# EAGLE board M8416C (EAGLE 6.6.0)

Size 398.65 x 214.63 mm. Coordinates in mm from the lower left corner, seen from the top.
Copper layers (1+16): Top 0.035mm / dielectric 1.5mm / Bottom 0.035mm
Design rules "16mils": minimum track width 16mil, minimum drill 32mil, track to track 15mil, track to pad 10mil, pad to pad 10mil, via to via 10mil, smd to smd 10mil, copper to edge 13mil, drill to drill 10mil, minimum pad ring 10mil, minimum via ring 8mil, stop-mask expansion 0mil, vias tented up to drill 0mil, thermal gap 10mil

## Footprints (pad centres in the part's own frame; a part is rotated, then mirrored left to right if it is on the bottom)
E12-8 = drill 1.016: + -10.16,0 | drill 1.016 octagon: - 10.16,0
C063-025X075 = drill 0.813 octagon: 1 -2.54,0; 2 3.81,0
DO35-10 = drill 0.813 long: A 5.08,0; C -5.08,0
DIL16 = drill 0.813 long: 1 -8.89,-3.81; 2 -6.35,-3.81; 3 -3.81,-3.81; 4 -1.27,-3.81; 5 1.27,-3.81; 6 3.81,-3.81; 7 6.35,-3.81; 8 8.89,-3.81; 9 8.89,3.81; 10 6.35,3.81; 11 3.81,3.81; 12 1.27,3.81; 13 -1.27,3.81; 14 -3.81,3.81; 15 -6.35,3.81; 16 -8.89,3.81
DIL14 = drill 0.813 long: 1 -7.62,-3.81; 2 -5.08,-3.81; 3 -2.54,-3.81; 4 0,-3.81; 5 2.54,-3.81; 6 5.08,-3.81; 7 7.62,-3.81; 8 7.62,3.81; 9 5.08,3.81; 10 2.54,3.81; 11 0,3.81; 12 -2.54,3.81; 13 -5.08,3.81; 14 -7.62,3.81
SOCKET-16 = drill 0.813 long: 1 -8.89,-3.81; 2 -6.35,-3.81; 3 -3.81,-3.81; 4 -1.27,-3.81; 5 1.27,-3.81; 6 3.81,-3.81; 7 6.35,-3.81; 8 8.89,-3.81; 9 8.89,3.81; 10 6.35,3.81; 11 3.81,3.81; 12 1.27,3.81; 13 -1.27,3.81; 14 -3.81,3.81; 15 -6.35,3.81; 16 -8.89,3.81
DIL28 = drill 0.813 long: 1 -16.51,-7.62; 2 -13.97,-7.62; 3 -11.43,-7.62; 4 -8.89,-7.62; 5 -6.35,-7.62; 6 -3.81,-7.62; 7 -1.27,-7.62; 8 1.27,-7.62; 9 3.81,-7.62; 10 6.35,-7.62; 11 8.89,-7.62; 12 11.43,-7.62; 13 13.97,-7.62; 14 16.51,-7.62; 15 16.51,7.62; 16 13.97,7.62; 17 11.43,7.62; 18 8.89,7.62; 19 6.35,7.62; 20 3.81,7.62; 21 1.27,7.62; 22 -1.27,7.62; 23 -3.81,7.62; 24 -6.35,7.62; 25 -8.89,7.62; 26 -11.43,7.62; 27 -13.97,7.62; 28 -16.51,7.62
DIL24-6 = drill 0.813 long: 1 -13.97,-7.62; 2 -11.43,-7.62; 3 -8.89,-7.62; 4 -6.35,-7.62; 5 -3.81,-7.62; 6 -1.27,-7.62; 7 1.27,-7.62; 8 3.81,-7.62; 9 6.35,-7.62; 10 8.89,-7.62; 11 11.43,-7.62; 12 13.97,-7.62; 13 13.97,7.62; 14 11.43,7.62; 15 8.89,7.62; 16 6.35,7.62; 17 3.81,7.62; 18 1.27,7.62; 19 -1.27,7.62; 20 -3.81,7.62; 21 -6.35,7.62; 22 -8.89,7.62; 23 -11.43,7.62; 24 -13.97,7.62
10H = drill 0.914: 1 -5.08,-1.27 | drill 0.914 octagon: 2 -5.08,1.27; 3 -2.54,-1.27; 4 -2.54,1.27; 5 0,-1.27; 6 0,1.27; 7 2.54,-1.27; 8 2.54,1.27; 9 5.08,-1.27; 10 5.08,1.27 | hole 3.302: -10.922,0.533; 10.922,0.533
TO5 = drill 0.813 octagon: 1 0,-2.54; 2 2.54,0; 3 0,2.54
0207/10 = drill 0.813 octagon: 1 -5.08,0; 2 5.08,0
0207/15 = drill 0.813 octagon: 1 -7.62,0; 2 7.62,0
EDGE-CON12 = smd 2.032 x 13.106: AA1 394.652,7.938; AB1 391.478,7.938; AC1 388.303,7.938; AD1 385.127,7.938; AE1 381.952,7.938; AF1 378.777,7.938; AH1 375.603,7.938; AJ1 372.428,7.938; AK1 369.252,7.938; AL1 366.077,7.938; AM1 362.902,7.938; AN1 359.728,7.938; AP1 356.553,7.938; AR1 353.377,7.938; AS1 350.202,7.938; AT1 347.027,7.938; AU1 343.853,7.938; AV1 340.678,7.938; BA1 324.803,7.938; BB1 321.627,7.938; BC1 318.452,7.938; BD1 315.277,7.938; BE1 312.103,7.938; BF1 308.928,7.938; BH1 305.752,7.938; BJ1 302.577,7.938; BK1 299.402,7.938; BL1 296.228,7.938; BM1 293.053,7.938; BN1 289.877,7.938; BP1 286.702,7.938; BR1 283.527,7.938; BS1 280.353,7.938; BT1 277.178,7.938; BU1 274.002,7.938; BV1 270.827,7.938; CA1 261.303,7.938; CB1 258.127,7.938; CC1 254.952,7.938; CD1 251.778,7.938; CE1 248.602,7.938; CF1 245.428,7.938; CH1 242.252,7.938; CJ1 239.077,7.938; CK1 235.903,7.938; CL1 232.727,7.938; CM1 229.553,7.938; CN1 226.377,7.938; CP1 223.202,7.938; CR1 220.028,7.938; CS1 216.852,7.938; CT1 213.678,7.938; CU1 210.502,7.938; CV1 207.327,7.938; DA1 191.452,7.938; DB1 188.278,7.938; DC1 185.102,7.938; DD1 181.928,7.938; DE1 178.752,7.938; DF1 175.577,7.938; DH1 172.403,7.938; DJ1 169.227,7.938; DK1 166.053,7.938; DL1 162.877,7.938; DM1 159.702,7.938; DN1 156.528,7.938; DP1 153.352,7.938; DR1 150.178,7.938; DS1 147.002,7.938; DT1 143.827,7.938; DU1 140.653,7.938; DV1 137.477,7.938; EA1 127.953,7.938; EB1 124.778,7.938; EC1 121.603,7.938; ED1 118.427,7.938; EE1 115.252,7.938; EF1 112.078,7.938; EH1 108.903,7.938; EJ1 105.728,7.938; EK1 102.552,7.938; EL1 99.377,7.938; EM1 96.203,7.938; EN1 93.028,7.938; EP1 89.853,7.938; ER1 86.677,7.938; ES1 83.502,7.938; ET1 80.328,7.938; EU1 77.153,7.938; EV1 73.978,7.938; FA1 58.102,7.938; FB1 54.928,7.938; FC1 51.752,7.938; FD1 48.578,7.938; FE1 45.403,7.938; FF1 42.227,7.938; FH1 39.053,7.938; FJ1 35.877,7.938; FK1 32.703,7.938; FL1 29.527,7.938; FM1 26.352,7.938; FN1 23.177,7.938; FP1 20.003,7.938; FR1 16.828,7.938; FS1 13.652,7.938; FT1 10.477,7.938; FU1 7.303,7.938; FV1 4.128,7.938 | smd 2.032 x 13.106 bottom: AA2 394.652,7.938; AB2 391.478,7.938; AC2 388.303,7.938; AD2 385.127,7.938; AE2 381.952,7.938; AF2 378.777,7.938; AH2 375.603,7.938; AJ2 372.428,7.938; AK2 369.252,7.938; AL2 366.077,7.938; AM2 362.902,7.938; AN2 359.728,7.938; AP2 356.553,7.938; AR2 353.377,7.938; AS2 350.202,7.938; AT2 347.027,7.938; AU2 343.853,7.938; AV2 340.678,7.938; BA2 324.803,7.938; BB2 321.627,7.938; BC2 318.452,7.938; BD2 315.277,7.938; BE2 312.103,7.938; BF2 308.928,7.938; BH2 305.752,7.938; BJ2 302.577,7.938; BK2 299.402,7.938; BL2 296.228,7.938; BM2 293.053,7.938; BN2 289.877,7.938; BP2 286.702,7.938; BR2 283.527,7.938; BS2 280.353,7.938; BT2 277.178,7.938; BU2 274.002,7.938; BV2 270.827,7.938; CA2 261.303,7.938; CB2 258.127,7.938; CC2 254.952,7.938; CD2 251.778,7.938; CE2 248.602,7.938; CF2 245.428,7.938; CH2 242.252,7.938; CJ2 239.077,7.938; CK2 235.903,7.938; CL2 232.727,7.938; CM2 229.553,7.938; CN2 226.377,7.938; CP2 223.202,7.938; CR2 220.028,7.938; CS2 216.852,7.938; CT2 213.678,7.938; CU2 210.502,7.938; CV2 207.327,7.938; DA2 191.452,7.938; DB2 188.278,7.938; DC2 185.102,7.938; DD2 181.928,7.938; DE2 178.752,7.938; DF2 175.577,7.938; DH2 172.403,7.938; DJ2 169.227,7.938; DK2 166.053,7.938; DL2 162.877,7.938; DM2 159.702,7.938; DN2 156.528,7.938; DP2 153.352,7.938; DR2 150.178,7.938; DS2 147.002,7.938; DT2 143.827,7.938; DU2 140.653,7.938; DV2 137.477,7.938; EA2 127.953,7.938; EB2 124.778,7.938; EC2 121.603,7.938; ED2 118.427,7.938; EE2 115.252,7.938; EF2 112.078,7.938; EH2 108.903,7.938; EJ2 105.728,7.938; EK2 102.552,7.938; EL2 99.377,7.938; EM2 96.203,7.938; EN2 93.028,7.938; EP2 89.853,7.938; ER2 86.677,7.938; ES2 83.502,7.938; ET2 80.328,7.938; EU2 77.153,7.938; EV2 73.978,7.938; FA2 58.102,7.938; FB2 54.928,7.938; FC2 51.752,7.938; FD2 48.578,7.938; FE2 45.403,7.938; FF2 42.227,7.938; FH2 39.053,7.938; FJ2 35.877,7.938; FK2 32.703,7.938; FL2 29.527,7.938; FM2 26.352,7.938; FN2 23.177,7.938; FP2 20.003,7.938; FR2 16.828,7.938; FS2 13.652,7.938; FT2 10.477,7.938; FU2 7.303,7.938; FV2 4.128,7.938
HEX-HEIGHT = hole 3.175: 208.915,209.55; 259.715,209.55; 190.5,209.55; 139.065,209.55; 75.616,209.55; 126.416,209.55; 57.201,209.55; 5.766,209.55; 342.265,209.55; 393.065,209.55; 323.85,209.55; 272.415,209.55

## Placement (x,y rotation side)
C1  6.8uF  [E12-8]  377.06,29.21 180 top
C2  .047uF  [C063-025X075]  379.6,48.26 0 top
C3  .047uF  [C063-025X075]  377.06,114.3 0 top
C4  .047uF  [C063-025X075]  379.6,184.15 0 top
C5  .047uF  [C063-025X075]  351.66,81.28 0 top
C6  .047uF  [C063-025X075]  322.45,48.26 0 top
C7  .047uF  [C063-025X075]  323.72,184.15 0 top
C8  6.8uF  [E12-8]  309.75,29.21 180 top
C9  .047uF  [C063-025X075]  299.59,113.03 0 top
C10  .047uF  [C063-025X075]  300.86,184.15 0 top
C11  .047uF  [C063-025X075]  272.92,39.37 0 top
C12  100pF  [C063-025X075]  271.65,43.18 0 top
C13  .047uF  [C063-025X075]  267.84,166.37 0 top
C14  6.8uF  [E12-8]  251.33,29.21 180 top
C15  .047uF  [C063-025X075]  213.23,130.81 0 top
C16  6.8uF  [E12-8]  180.21,29.21 180 top
C17  .047uF  [C063-025X075]  159.89,46.99 0 top
C18  .047uF  [C063-025X075]  164.97,97.79 0 top
C19  100pF  [C063-025X075]  161.16,147.32 0 top
C20  .047uF  [C063-025X075]  163.7,165.1 0 top
C21  .047uF  [C063-025X075]  161.16,185.42 0 top
C22  .047uF  [C063-025X075]  134.49,80.01 0 top
C23  .047uF  [C063-025X075]  138.3,185.42 0 top
C24  6.8uF  [E12-8]  109.09,29.21 180 top
C25  .047uF  [C063-025X075]  105.28,63.5 0 top
C26  .047uF  [C063-025X075]  107.82,114.3 0 top
C27  .047uF  [C063-025X075]  81.15,46.99 0 top
C28  .047uF  [C063-025X075]  79.88,80.01 0 top
C29  .047uF  [C063-025X075]  74.8,185.42 0 top
C31  .047uF  [C063-025X075]  51.94,96.52 0 top
C32  .047uF  [C063-025X075]  51.94,147.32 0 top
C33  .047uF  [C063-025X075]  51.94,185.42 0 top
C34  .047uF  [C063-025X075]  24,48.26 0 top
C35  .047uF  [C063-025X075]  24,96.52 0 top
C36  .047uF  [C063-025X075]  24,130.81 0 top
D1  1N5711  [DO35-10]  258.95,46.99 180 top
E1  74173N  [DIL16]  377.06,39.37 0 top
E2  74LS04N  [DIL14]  375.79,55.88 0 top
E3  DS8640N  [DIL14]  375.79,72.39 0 top
E4  N8881N  [DIL14]  375.79,88.9 0 top
E5  74LS04N  [DIL14]  375.79,105.41 0 top
E6  74LS00N  [DIL14]  375.79,121.92 0 top
E7  74LS04N  [DIL14]  375.79,139.7 0 top
E8  N8881N  [DIL14]  375.79,156.21 0 top
E9  74LS20N  [DIL14]  375.79,175.26 0 top
E10  [SOCKET-16]  377.06,194.31 0 top
E11  DS8640N  [DIL14]  347.85,39.37 0 top
E12  DS8641N  [DIL16]  349.12,55.88 0 top
E13  DS8641N  [DIL16]  349.12,72.39 0 top
E14  82S100  [DIL28]  338.96,100.33 0 top
E15  74LS174N  [DIL16]  349.12,121.92 0 top
E16  82S100  [DIL28]  333.88,148.59 0 top
E17  74LS174N  [DIL16]  349.12,175.26 0 top
E18  74LS00N  [DIL14]  347.85,194.31 0 top
E19  N8881N  [DIL14]  321.18,39.37 0 top
E20  74LS01N  [DIL14]  321.18,55.88 0 top
E21  74LS10N  [DIL14]  321.18,72.39 0 top
E22  74LS04N  [DIL14]  321.18,121.92 0 top
E23  74LS258N  [DIL16]  322.45,175.26 0 top
E24  74LS10N  [DIL14]  321.18,194.31 0 top
E25  DS8640N  [DIL14]  294.51,39.37 0 top
E26  74LS75N  [DIL16]  295.78,55.88 0 top
E27  74S11N  [DIL14]  294.51,72.39 0 top
E28  74S287  [DIL16]  295.78,88.9 0 top
E29  74LS02N  [DIL14]  294.51,105.41 0 top
E30  74LS30N  [DIL14]  294.51,121.92 0 top
E31  74154N  [DIL24-6]  281.81,148.59 0 top
E32  74S74N  [DIL14]  294.51,175.26 0 top
E33  74LS08N  [DIL14]  294.51,194.31 0 top
E34  74LS42N  [DIL16]  267.84,55.88 0 top
E35  74LS175N  [DIL16]  267.84,72.39 0 top
E36  74LS20N  [DIL14]  266.57,88.9 0 top
E37  74367N  [DIL16]  267.84,105.41 0 top
E38  74LS37N  [DIL14]  266.57,121.92 0 top
E39  74LS04N  [DIL14]  266.57,175.26 0 top
E40  [SOCKET-16]  267.84,194.31 0 top
E41  DS8640N  [DIL14]  239.9,39.37 0 top
E42  N8881N  [DIL14]  239.9,55.88 0 top
E43  74LS20N  [DIL14]  239.9,72.39 0 top
E44  74LS04N  [DIL14]  239.9,88.9 0 top
E45  DS8641N  [DIL16]  241.17,105.41 0 top
E46  74LS175N  [DIL16]  241.17,121.92 0 top
E47  74LS02N  [DIL14]  239.9,139.7 0 top
E48  74LS02N  [DIL14]  239.9,156.21 0 top
E49  74LS10N  [DIL14]  239.9,175.26 0 top
E50  74LS00N  [DIL14]  239.9,194.31 0 top
E51  DS8640N  [DIL14]  211.96,39.37 0 top
E52  SP384N  [DIL14]  211.96,55.88 0 top
E53  SP384N  [DIL14]  211.96,72.39 0 top
E54  74LS00N  [DIL14]  211.96,88.9 0 top
E55  74367N  [DIL16]  213.23,105.41 0 top
E56  74LS10N  [DIL14]  211.96,121.92 0 top
E57  74LS00N  [DIL14]  211.96,139.7 0 top
E58  74LS04N  [DIL14]  211.96,156.21 0 top
E59  74LS74N  [DIL14]  211.96,175.26 0 top
E60  74LS74N  [DIL14]  211.96,194.31 0 top
E61  DS8640N  [DIL14]  184.02,39.37 0 top
E62  74173N  [DIL16]  185.29,55.88 0 top
E63  74S74N  [DIL14]  184.02,72.39 0 top
E64  74S02N  [DIL14]  184.02,88.9 0 top
E65  74S74N  [DIL14]  184.02,105.41 0 top
E66  74LS00N  [DIL14]  184.02,121.92 0 top
E67  74LS08N  [DIL14]  184.02,139.7 0 top
E68  74LS85N  [DIL16]  185.29,156.21 0 top
E69  8266  [DIL16]  185.29,175.26 0 top
E70  74LS00N  [DIL14]  184.02,194.31 0 top
E71  DS8640N  [DIL14]  157.35,39.37 0 top
E72  SP384N  [DIL14]  157.35,55.88 0 top
E73  74173N  [DIL16]  158.62,72.39 0 top
E74  74S287  [DIL16]  158.62,88.9 0 top
E75  SP384N  [DIL14]  157.35,105.41 0 top
E76  74LS74N  [DIL14]  157.35,121.92 0 top
E77  74LS221N  [DIL16]  158.62,139.7 0 top
E78  74LS85N  [DIL16]  158.62,156.21 0 top
E79  8266  [DIL16]  158.62,175.26 0 top
E80  74S288  [DIL16]  158.62,194.31 0 top
E81  82S100  [DIL28]  120.52,45.72 0 top
E82  74S189  [DIL16]  131.95,72.39 0 top
E83  74367N  [DIL16]  131.95,88.9 0 top
E84  74367N  [DIL16]  131.95,105.41 0 top
E85  74LS174N  [DIL16]  131.95,121.92 0 top
E86  74368N  [DIL16]  131.95,139.7 0 top
E87  74S287  [DIL16]  131.95,156.21 0 top
E88  74LS174N  [DIL16]  131.95,175.26 0 top
E89  74148N  [DIL16]  131.95,194.31 0 top
E90  74173N  [DIL16]  104.01,72.39 0 top
E91  74367N  [DIL16]  104.01,88.9 0 top
E92  74LS10N  [DIL14]  102.74,105.41 0 top
E93  74LS175N  [DIL16]  104.01,121.92 0 top
E94  74LS00N  [DIL14]  102.74,139.7 0 top
E95  74368N  [DIL16]  104.01,156.21 0 top
E96  74368N  [DIL16]  104.01,175.26 0 top
E97  74173N  [DIL16]  104.01,194.31 0 top
E98  74173N  [DIL16]  77.34,39.37 0 top
E99  74173N  [DIL16]  77.34,55.88 0 top
E100  74368N  [DIL16]  77.34,72.39 0 top
E101  74367N  [DIL16]  77.34,88.9 0 top
E102  74LS175N  [DIL16]  77.34,105.41 0 top
E103  74LS174N  [DIL16]  77.34,121.92 0 top
E104  74367N  [DIL16]  77.34,139.7 0 top
E105  74367N  [DIL16]  77.34,156.21 0 top
E106  74368N  [DIL16]  77.34,175.26 0 top
E107  74367N  [DIL16]  77.34,194.31 0 top
E108  74LS175N  [DIL16]  49.4,39.37 0 top
E109  82S100  [DIL28]  35.43,63.5 0 top
E110  74LS175N  [DIL16]  49.4,88.9 0 top
E111  74S571  [DIL16]  49.4,105.41 0 top
E112  74S571  [DIL16]  49.4,121.92 0 top
E113  74S287  [DIL16]  49.4,139.7 0 top
E114  74S571  [DIL16]  49.4,156.21 0 top
E115  74LS04N  [DIL14]  48.13,175.26 0 top
E116  74LS175N  [DIL16]  21.46,39.37 0 top
E117  74LS175N  [DIL16]  21.46,88.9 0 top
E118  74173N  [DIL16]  21.46,105.41 0 top
E119  74173N  [DIL16]  21.46,121.92 0 top
E120  74S139N  [DIL16]  21.46,139.7 0 top
E121  74173N  [DIL16]  21.46,156.21 0 top
E122  74173N  [DIL16]  21.46,175.26 0 top
J1  [10H]  31.62,189.23 0 top
Q1  2N3009  [TO5]  261.49,38.1 90 top
R1  1K  [0207/10]  333.88,166.37 0 top
R2  1K  [0207/10]  316.1,166.37 0 top
R3  1K  [0207/10]  289.43,97.79 0 top
R4  10K  [0207/10]  284.35,184.15 0 top
R5  470  [0207/10]  274.19,46.99 0 top
R6  1K  [0207/10]  274.19,97.79 0 top
R7  1K  [0207/10]  258.95,97.79 0 top
R8  1K  [0207/10]  275.46,113.03 0 top
R9  1K  [0207/10]  261.49,113.03 0 top
R10  1K  [0207/10]  309.75,81.28 0 top
R11  10K  [0207/10]  203.07,97.79 0 top
R12  1K  [0207/10]  211.96,113.03 0 top
R13  10K  [0207/10]  211.96,185.42 0 top
R14  1K  [0207/10]  187.83,80.01 0 top
R15  10K  [0207/10]  172.59,80.01 0 top
R16  1K  [0207/10]  195.45,185.42 0 top
R17  1K  [0207/10]  180.21,185.42 0 top
R18  10K  [0207/10]  170.05,130.81 0 top
R19  10K  [0207/10]  154.81,130.81 0 top
R20  14.7K 1%  [0207/15]  147.19,147.32 0 top
R21  10K  [0207/10]  148.46,165.1 0 top
R22  1K  [0207/10]  133.22,60.96 0 top
R23  1K  [0207/10]  128.14,63.5 0 top
R24  1K  [0207/10]  139.57,130.81 0 top
R25  27  [0207/10]  124.33,130.81 0 top
R26  1K  [0207/10]  130.68,147.32 0 top
R27  27  [0207/10]  116.71,147.32 0 top
R28  1K  [0207/10]  121.79,166.37 0 top
R29  1K  [0207/10]  121.79,185.42 0 top
R30  10K  [0207/10]  91.31,114.3 0 top
R31  1K  [0207/10]  109.09,130.81 0 top
R32  1K  [0207/10]  106.55,166.37 0 top
R33  1K  [0207/10]  91.31,166.37 0 top
R34  1K  [0207/10]  106.55,185.42 0 top
R35  1K  [0207/10]  91.31,185.42 0 top
R36  10K  [0207/10]  36.7,80.01 0 top
R37  10K  [0207/10]  31.62,166.37 0 top
R38  10K  [0207/10]  31.62,182.88 0 top
R39  10K  [0207/10]  16.38,182.88 0 top
U$1  HEX  [EDGE-CON12]  -0.13,0 0 top
U$2  OUTLINE-HEX  [HEX-HEIGHT]  -0.13,0 0 top

## Library data of the parts
C1-C29 C31-C36 E3 E4 E8 E11-E14 E16 E19 E25 E28 E30 E41 E42 E45 E51-E53 E61 E69 E71 E72 E74 E75 E79-E82 E87 E109 E111-E114 U$1 U$2 = dec-con
D1 = diode
E1 E2 E5-E7 E9 E15 E17 E18 E20-E24 E26 E27 E29 E31-E39 E43 E44 E46-E50 E54-E60 E62-E68 E70 E73 E76 E78 E83-E86 E88-E108 E110 E115-E122 = 74xx-us
E10 E40 = ic-package
E77 = 74xx-eu
J1 = con-harting-h; OC_FARNELL: unknown; OC_NEWARK: unknown
Q1 = transistor
R1-R39 = rcl

## Nets
GND: C1.- C2.2 C3.2 C4.2 C5.2 C6.2 C7.2 C8.- C9.2 C10.2 C11.2 C13.2 C14.- C15.2 C16.- C17.2 C18.2 C20.2 C21.2 C22.2 C23.2 C24.- C25.2 C26.2 C27.2 C28.2 C29.2 C31.2 C32.2 C33.2 C34.2 C35.2 C36.2 E1.8 E2.7 E3.1 E4.7 E5.7 E6.7 E7.7 E8.7 E9.7 E11.1 E12.8 E13.8 E14.14 E15.8 E16.14 E17.8 E18.7 E19.7 E20.7 E21.7 E22.7 E23.8 E24.7 E25.1 E26.12 E27.7 E28.8 E29.7 E30.7 E31.12 E32.7 E33.7 E34.8 E35.8 E36.7 E37.8 E38.7 E39.7 E41.1 E42.7 E43.7 E44.7 E45.8 E46.8 E47.7 E48.7 E49.7 E50.7 E51.1 E52.1 E53.1 E54.7 E55.8 E56.7 E57.7 E58.7 E59.7 E60.7 E61.1 E62.8 E63.7 E64.7 E65.7 E66.7 E67.7 E68.8 E69.8 E70.7 E71.1 E72.1 E73.8 E74.8 E75.1 E76.7 E77.8 E78.8 E79.8 E80.8 E81.14 E82.8 E83.8 E84.8 E85.8 E86.8 E87.8 E88.8 E89.8 E90.8 E91.8 E92.7 E93.8 E94.7 E95.8 E96.8 E97.8 E98.8 E99.8 E100.8 E101.8 E102.8 E103.8 E104.8 E105.8 E106.8 E107.8 E108.8 E109.14 E110.8 E111.8 E112.8 E113.8 E114.8 E115.7 E116.8 E117.8 E118.8 E119.8 E120.8 E121.8 E122.8 U$1.AC1 U$1.AC2 U$1.AF1 U$1.AF2 U$1.AN1 U$1.AN2 U$1.AT1 U$1.AT2 U$1.BC1 U$1.BC2 U$1.BF1 U$1.BF2 U$1.BN1 U$1.BN2 U$1.BT1 U$1.BT2 U$1.CC1 U$1.CC2 U$1.CF1 U$1.CF2 U$1.CN1 U$1.CN2 U$1.CT1 U$1.CT2 U$1.DC1 U$1.DC2 U$1.DF1 U$1.DF2 U$1.DN1 U$1.DN2 U$1.DT1 U$1.DT2
VCC: C1.+ C2.1 C3.1 C4.1 C5.1 C6.1 C7.1 C8.+ C9.1 C10.1 C11.1 C13.1 C14.+ C15.1 C16.+ C17.1 C18.1 C20.1 C21.1 C22.1 C23.1 C24.+ C25.1 C26.1 C27.1 C28.1 C29.1 C31.1 C32.1 C33.1 C34.1 C35.1 C36.1 E1.16 E2.14 E3.8 E4.14 E5.14 E6.14 E7.14 E8.14 E9.14 E11.8 E12.16 E13.16 E14.28 E15.16 E16.28 E17.16 E18.14 E19.14 E20.14 E21.14 E22.14 E23.16 E24.14 E25.8 E26.5 E27.14 E28.16 E29.14 E30.14 E31.24 E32.14 E33.14 E34.16 E35.16 E36.14 E37.16 E38.14 E39.14 E41.8 E42.14 E43.14 E44.14 E45.16 E46.16 E47.14 E48.14 E49.14 E50.14 E51.8 E52.8 E53.8 E54.14 E55.16 E56.14 E57.14 E58.14 E59.14 E60.14 E61.8 E62.16 E63.14 E64.14 E65.14 E66.14 E67.14 E68.16 E69.16 E70.14 E71.8 E72.8 E73.16 E74.16 E75.8 E76.14 E77.16 E78.16 E79.16 E80.16 E81.28 E82.16 E83.16 E84.16 E85.16 E86.16 E87.16 E88.16 E89.16 E90.16 E91.16 E92.14 E93.16 E94.14 E95.16 E96.16 E97.16 E98.16 E99.16 E100.16 E101.16 E102.16 E103.16 E104.16 E105.16 E106.16 E107.16 E108.16 E109.28 E110.16 E111.16 E112.16 E113.16 E114.16 E115.14 E116.16 E117.16 E118.16 E119.16 E120.16 E121.16 E122.16 U$1.AA2 U$1.BA2 U$1.CA2

## Tracks (layer width: path | path; a pad name or v marks a point on that pad's centre or on a via)
GND  (184 unrouted)
VCC  (155 unrouted)

## Text on the board
200bmp: C:/Users/Vince/Documents/eagle/projects/DEC/Mxxx/M8416/M8416Cfrontb.bmp